# Altium PCB BF-5-0-0.PcbDoc
Units mil, origin at the board's own origin, x right, y up, seen from the top; angles counter-clockwise.
Board outline 3937.01 x 3937.01 mil, 2 copper layers (Top Layer, Bottom Layer); 119 components, 64 nets, 312 pads, 51 vias.
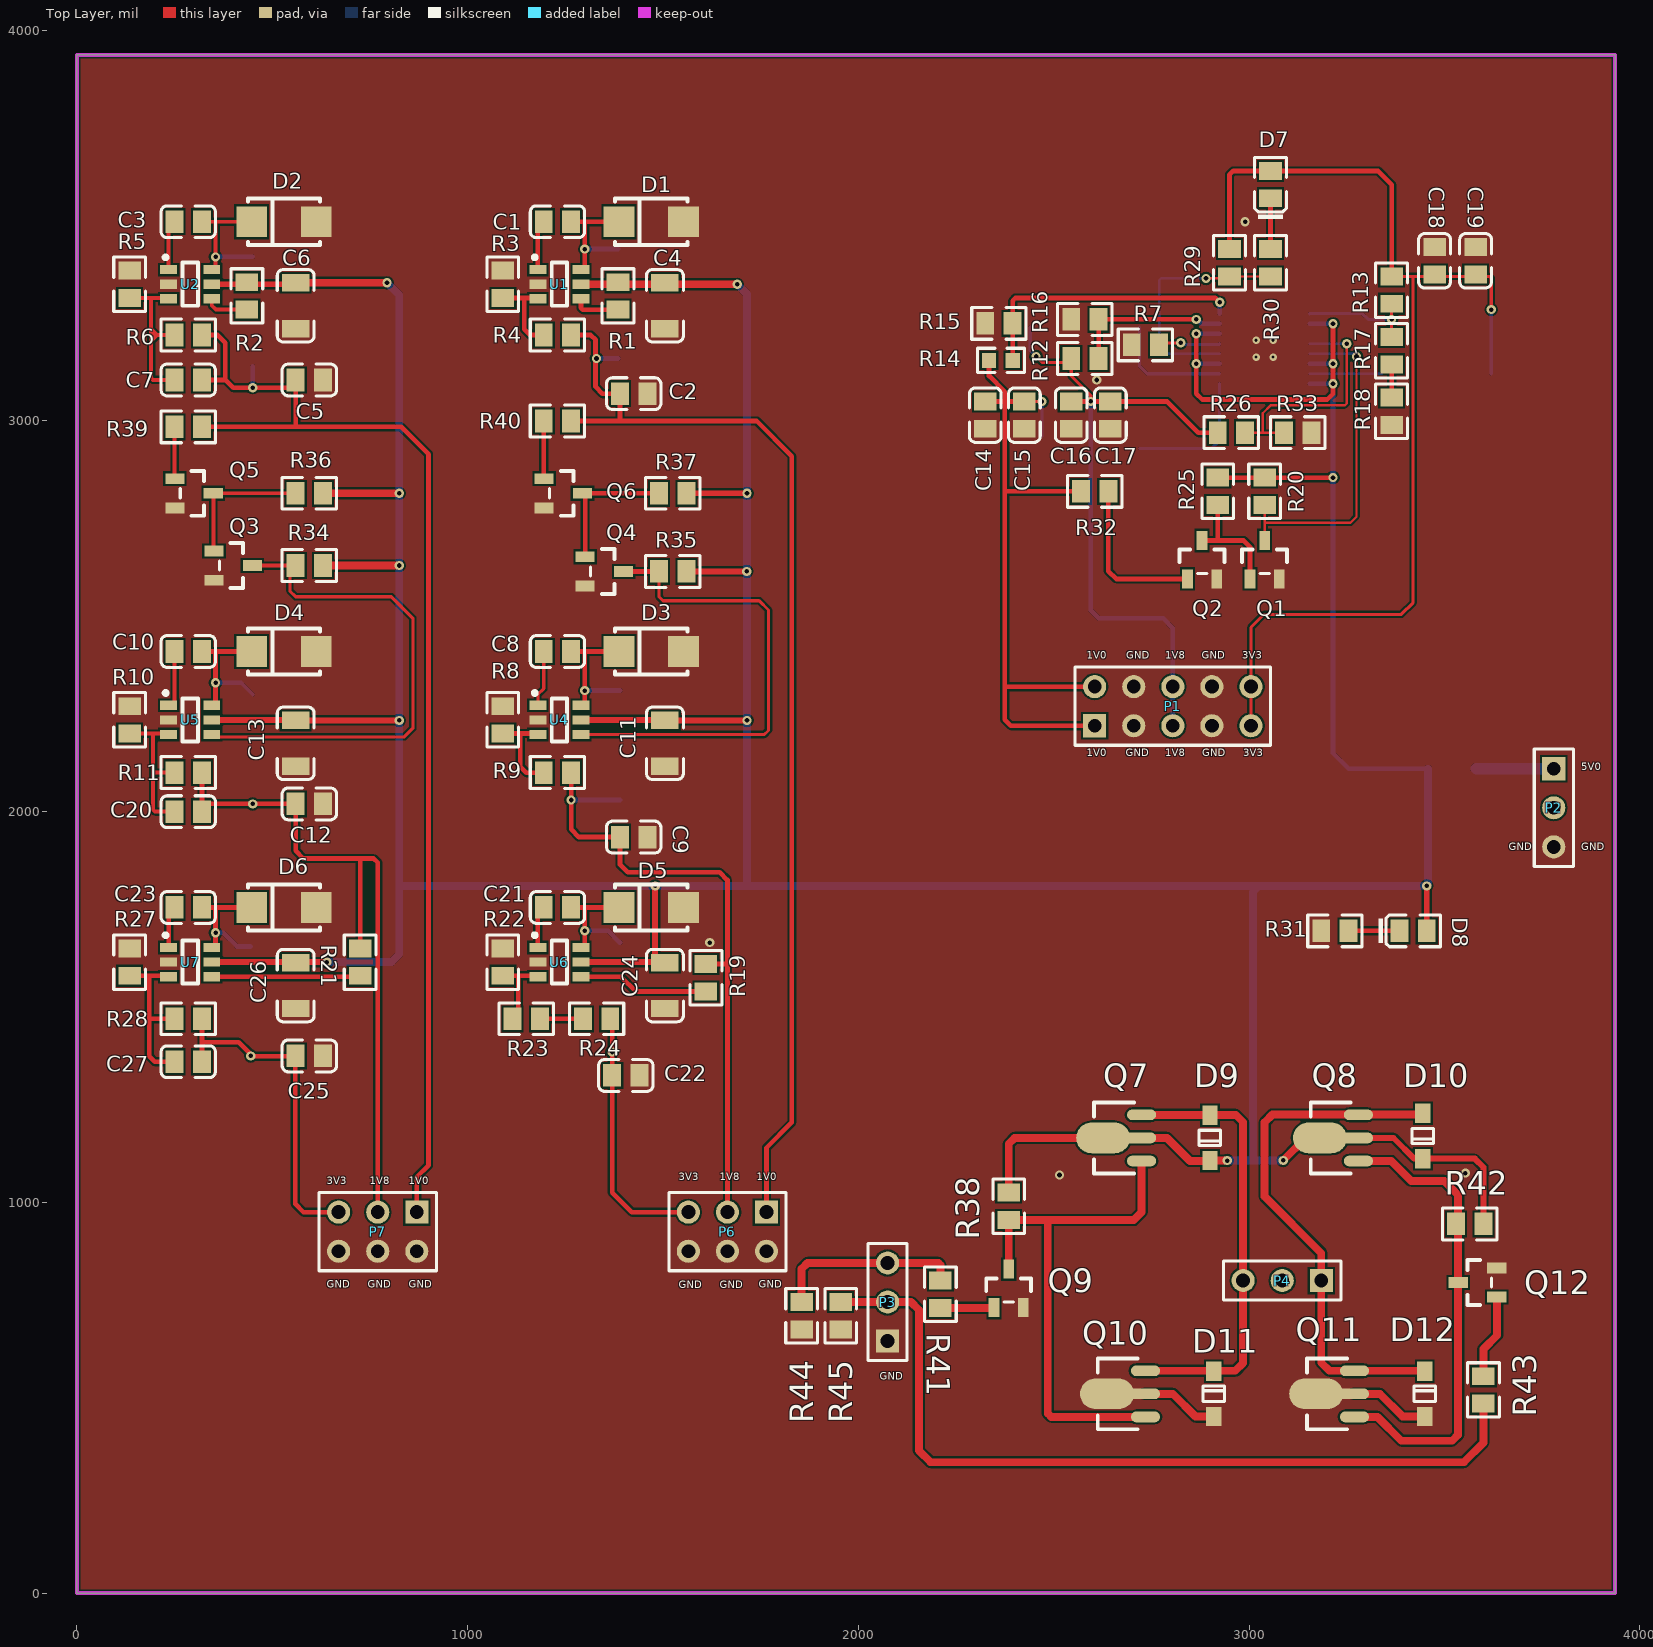
[diagram p0: Top Layer view]
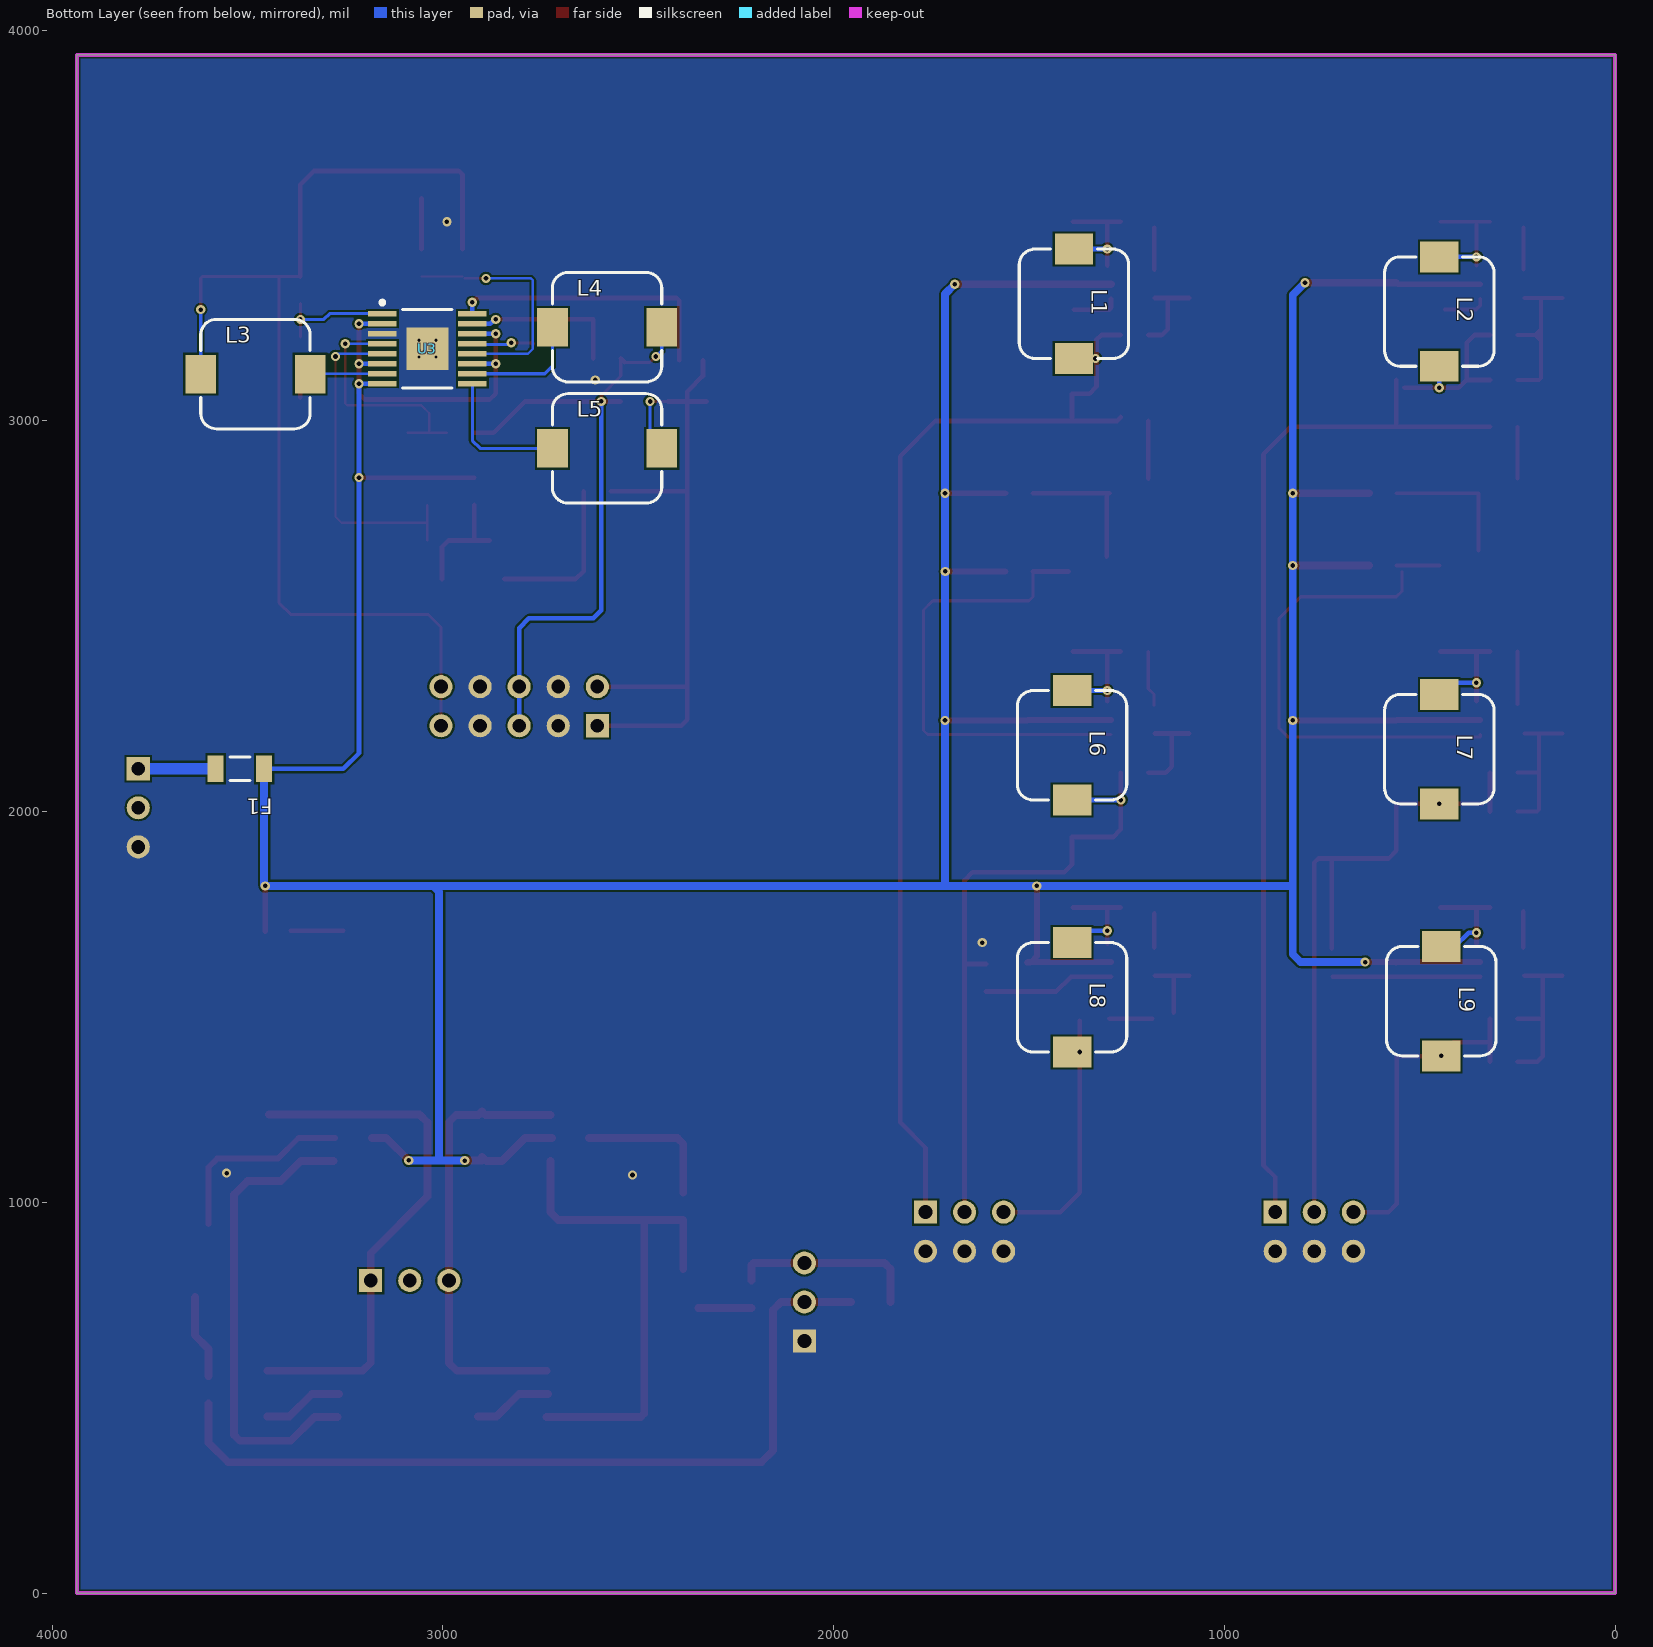
[diagram p1: Bottom Layer view, seen from below]

## Layer stack, top to bottom
Top Solder: solder mask 0.4, Solder Resist, Dk 3.5
Top Layer: signal copper 1.4
Dielectric 1: dielectric 12.6, FR-4, Dk 4.8
Bottom Layer: signal copper 1.4
Bottom Solder: solder mask 0.4, Solder Resist, Dk 3.5

## Board outline
0,0 3937.01,0 3937.01,3937.01 0,3937.01

## Design rules (kind name [scope] priority, off if disabled: settings)
Clearance [All] p1: gap=5 ignorepadtopadclearanceinfootprint=FALSE except(0: Arc-Hole Track-Hole SMDPad-Hole THPad-Hole Via-Hole Fill-Hole Poly-Hole Region-Hole Text-Hole; 10: Arc-Text Track-Text SMDPad-Text THPad-Text Via-Text Fill-Text Poly-Text Region-Text Text-Text)
PlaneClearance [All] p1: clearance=8
PlaneConnect [All] p1: planeconnectstyle=Direct reliefexpansion=20 reliefentries=4 reliefconductorwidth=10 reliefairgap=10
PolygonConnect [All] p1: connectstyle=Direct reliefconductorwidth=10 reliefentries=4 polygonreliefangle="90 Angle" airgapwidth=10
RoutingVias [All] p1: holewidth=28 width=50 viastyle="Through Hole" minholewidth=28 minwidth=50 maxholewidth=28 maxwidth=50
SolderMaskExpansion [All] p1: expansion=4
Width [All] p1: maxlimit=50 minlimit=6 preferedwidth=10 minimp=50.000000 maximp=50.000000 favimp=50.000000
28 further rules are at their usual default settings.

## Components (designator, comment, footprint, x,y, rotation, side; value= is the part's Value field where it differs from the comment)
C1 "10nF (103) 10% 50V" 0805_C 1230,3510 r180 top
C2 "22uF (226) 20% 25V" 0805_C 1425,3070 r0 top
C3 "100nF(104) 10% 50V" 0805_C 285,3510 r180 top
C4 "10uF (106) 10% 50V" 1206_C 1505,3295 r90 top
C5 "10uF (106) 10% 25V" 0805_C 595,3105 r0 top
C6 "10uF (106) 10% 50V" 1206_C 560,3295 r90 top
C7 "33pF (330) 5% 50V" 0805_C 285,3105 r0 top
C8 "10nF (103) 10% 50V" 0805_C 1230,2410 r180 top
C9 "22uF (226) 20% 25V" 0805_C 1425,1935 r0 top
C10 "100nF(104) 10% 50V" 0805_C 285,2410 r180 top
C11 "10uF (106) 10% 50V" 1206_C 1505,2175 r90 top
C12 "10uF (106) 10% 25V" 0805_C 595,2020 r0 top
C13 "10uF (106) 10% 50V" 1206_C 560,2175 r90 top
C14 "20pF (200) 5% 50V" 0805_C 2325,3015 r90 top
C15 "22uF (226) 20% 25V" 0805_C 2425,3015 r90 top
C16 "20pF (200) 5% 50V" 0805_C 2545,3015 r90 top
C17 "10uF (106) 10% 25V" 0805_C 2645,3015 r90 top
C18 "20pF (200) 5% 50V" 0805_C 3475,3410 r270 top
C19 "10uF (106) 10% 25V" 0805_C 3580,3410 r270 top
C20 "33pF (330) 5% 50V" 0805_C 285,2000 r0 top
C21 "10nF (103) 10% 50V" 0805_C 1230,1755 r180 top
C22 "22uF (226) 20% 25V" 0805_C 1405,1325 r0 top
C23 "100nF(104) 10% 50V" 0805_C 285,1755 r180 top
C24 "10uF (106) 10% 50V" 1206_C 1505,1554.96 r90 top
C25 "10uF (106) 10% 25V" 0805_C 595,1375 r0 top
C26 "10uF (106) 10% 50V" 1206_C 560,1554.96 r90 top
C27 "33pF (330) 5% 50V" 0805_C 285,1360 r0 top
D1 "SS54" SMA(DO-214AC)_S1 1470,3510 r0 top
D2 "SS54" SMA(DO-214AC)_S1 530,3510 r0 top
D3 "SS54" SMA(DO-214AC)_S1 1470,2410 r0 top
D4 "SS54" SMA(DO-214AC)_S1 530,2410 r0 top
D5 "SS54" SMA(DO-214AC)_S1 1470,1755 r0 top
D6 "SS54" SMA(DO-214AC)_S1 530,1755 r0 top
D7 "黄灯 0805" 0805_LED_S1 3055,3605 r90 top
D8 "翠绿 0805" 0805_LED_S1 3420,1695 r0 top
D9 "B5819W  SL" SOD-123 2900,1165 r90 top
D10 "B5819W  SL" SOD-123 3445,1170 r90 top
D11 "B5819W  SL" SOD-123 2910,510 r270 top
D12 "B5819W  SL" SOD-123 3450,510 r270 top
F1 "Fuse 1" 1206 3520,2110 r0 bottom
L1 "33uH" L-SMD-7 1385,3300 r270 bottom
L2 "33uH" L-SMD-7 450,3280 r270 bottom
L3 "33uH" L-SMD-7 3480,3120 r180 bottom
L4 "33uH" L-SMD-7 2580,3240 r180 bottom
L5 "33uH" L-SMD-7 2580,2930 r180 bottom
L6 "33uH" L-SMD-7 1390,2170 r270 bottom
L7 "33uH" L-SMD-7 450,2160 r270 bottom
L8 "33uH" L-SMD-7 1390,1525 r270 bottom
L9 "33uH" L-SMD-7 445,1515 r270 bottom
P1 "Header 5X2" HDR2X5 2605,2220 r0 top
P2 "Header 3" HDR1X3 3780,2110 r270 top
P3 "Header 3" HDR1X3 2075,645 r90 top
P4 "Header 3" HDR1X3 3185,800 r180 top
P6 "Header 3X2" HDR2X3 1765,975 r180 top
P7 "Header 3X2" HDR2X3 870,975 r180 top
Q1 "SS8050 Y1" SOT-23(SOT-23-3) 3040,2645 r270 top
Q2 "SS8050 Y1" SOT-23(SOT-23-3) 2880,2645 r270 top
Q3 "MMBT5551  G1" SOT-23(SOT-23-3) 400,2630 r180 top
Q4 "SS8050 Y1" SOT-23(SOT-23-3) 1350,2615 r180 top
Q5 "MMBT5551  G1" SOT-23(SOT-23-3) 300,2815 r180 top
Q6 "SS8050 Y1" SOT-23(SOT-23-3) 1245,2815 r180 top
Q7 "D882" SOT-89(SOT-89-3) 2725,1165 r0 top
Q8 "D882" SOT-89(SOT-89-3) 3280,1165 r0 top
Q9 "SS8050 Y1" SOT-23(SOT-23-3) 2385,780 r270 top
Q10 "B772 160-320" SOT-89(SOT-89-3) 2735,510 r0 top
Q11 "B772 160-320" SOT-89(SOT-89-3) 3270,510 r0 top
Q12 "SS8050 Y1" SOT-23(SOT-23-3) 3585,795 r0 top
R1 "300Ω (3000) ±1%" 0805_R 1385,3320 r90 top
R2 "300Ω (3000) ±1%" 0805_R 435,3320 r90 top
R3 "220KΩ (2203) ±1%" 0805_R 1090,3350 r90 top
R4 "51KΩ (5102) ±1%" 0805_R 1230,3220 r0 top
R5 "470KΩ (4703) ±1%" 0805_R 135,3350 r270 top
R6 "120KΩ (1203) ±1%" 0805_R 285,3220 r0 top
R7 "100KΩ (1003) ±1%" 0805_R 2735,3195 r180 top
R8 "68KΩ (6802) ±1%" 0805_R 1090,2235 r270 top
R9 "82KΩ (8202) ±1%" 0805_R 1230,2100 r0 top
R10 "100KΩ (1003) ±1%" 0805_R 135,2235 r270 top
R11 "120KΩ (1203) ±1%" 0805_R 285,2100 r0 top
R12 "150KΩ (1503) ±1%" 0805_R 2580,3160 r180 top
R13 "180KΩ (1803) ±1%" 0805_R 3365,3335 r90 top
R14 "30KΩ (3002) ±1%" 0603_R 2365,3155 r180 top
R15 "120KΩ (1203) ±1%" 0805_R 2360,3250 r0 top
R16 "120KΩ (1203) ±1%" 0805_R 2580,3260 r0 top
R17 "56KΩ (5602) ±1%" 0805_R 3365,3180 r90 top
R18 "2KΩ (2001) ±1%" 0805_R 3365,3025 r90 top
R19 "300Ω (3000) ±1%" 0805_R 1610,1575 r270 top
R20 "100KΩ (1003) ±1%" 0805_R 3040,2820 r90 top
R21 "300Ω (3000) ±1%" 0805_R 725,1615 r270 top
R22 "16KΩ (1602) ±1%" 0805_R 1090,1615 r270 top
R23 "47KΩ (4702) ±1%" 0805_R 1150,1470 r0 top
R24 "2KΩ (2001) ±1%" 0805_R 1330,1470 r0 top
R25 "100KΩ (1003) ±1%" 0805_R 2920,2820 r90 top
R26 "2KΩ (2001) ±1%" 0805_R 2955,2970 r180 top
R27 "39KΩ (3902) ±1%" 0805_R 135,1615 r270 top
R28 "120KΩ (1203) ±1%" 0805_R 285,1470 r0 top
R29 "100KΩ (1003) ±1%" 0805_R 2950,3405 r90 top
R30 "5.1KΩ (5101) ±1%" 0805_R 3055,3405 r90 top
R31 "5.1KΩ (5101) ±1%" 0805_R 3220,1695 r0 top
R32 "300Ω (3000) ±1%" 0805_R 2605,2820 r180 top
R33 "10KΩ (1002) ±1%" 0805_R 3125,2970 r180 top
R34 "100KΩ (1003) ±1%" 0805_R 595,2630 r0 top
R35 "100KΩ (1003) ±1%" 0805_R 1525,2615 r0 top
R36 "100KΩ (1003) ±1%" 0805_R 595,2815 r0 top
R37 "100KΩ (1003) ±1%" 0805_R 1525,2815 r0 top
R38 "2KΩ (2001) ±1%" 0805_R 2385,990 r90 top
R39 "300Ω (3000) ±1%" 0805_R 285,2985 r180 top
R40 "300Ω (3000) ±1%" 0805_R 1230,3000 r0 top
R41 "1KΩ (1001) ±1%" 0805_R 2210,765 r270 top
R42 "2KΩ (2001) ±1%" 0805_R 3565,945 r0 top
R43 "1KΩ (1001) ±1%" 0805_R 3600,520 r90 top
R44 "10KΩ (1002) ±1%" 0805_R 1855,710 r270 top
R45 "10KΩ (1002) ±1%" 0805_R 1955,710 r90 top
U1 "MP2359DJ-LF-Z" SOT-23-6 1235,3350 r180 top
U2 "MP2451DT-LF-Z" SOT-23-6 290,3350 r180 top
U3 "LTC3569" SOP127P600-16N 3040,3185 r180 bottom
U4 "MP2359DJ-LF-Z" SOT-23-6 1235,2235 r180 top
U5 "MP2451DT-LF-Z" SOT-23-6 290,2235 r180 top
U6 "MP2359DJ-LF-Z" SOT-23-6 1235,1615 r180 top
U7 "MP2451DT-LF-Z" SOT-23-6 290,1615 r180 top

## Footprints (in the part's own frame and the unit in brackets; to place one, negate y for a bottom-side part, rotate by r counter-clockwise, add the part's x,y. Pads: shape width x height; smd on the part's side, far side on the other; paste and mask are expansions set on the pad)
0603_R [mm]
  rect 0.93x0.98 smd: 1(-0.77,0) 2(0.77,0)
  silkscreen extent -1.53,-0.79 1.54,0.79, body extent -0.85,-0.4 0.85,0.4, height 0.56
0805_C [mm]
  rect 1.16x1.47 smd: 1(-0.89,0) 2(0.89,0)
  silkscreen extent -1.77,-1.04 1.77,1.04, body extent -1,-0.62 1,0.63, height 0.77
0805_LED_S1 [mm]
  rect 1.16x1.47 smd: A(0.89,0) K(-0.89,0)
  silkscreen extent -2.24,-1.04 1.77,1.03, body extent -1.01,-0.62 1.01,0.62, height 1.1
0805_R [mm]
  rect 1.16x1.47 smd: 1(-0.89,0) 2(0.89,0)
  silkscreen extent -1.77,-1.04 1.77,1.03, body extent -1,-0.62 1,0.63, height 0.49
1206 [mm]
  rect 1.05x1.75 smd: 1(-1.575,0) 2(1.575,0)
  silkscreen extent -0.65,-0.77 0.65,0.77, body extent -1.6,-0.8 1.6,0.8, height 1.6
1206_C [mm]
  rect 1.13x1.8 smd: 1(-1.49,0) 2(1.49,0)
  silkscreen extent -2.36,-1.2 2.35,1.2, body extent -1.6,-0.81 1.6,0.79, height 1
HDR1X3 [mm] "Connector; Header; 3 Position"
  rect 1.5x1.5 hole 0.9: 1(0,0)
  round 1.5 hole 0.9: 2(2.54,0) 3(5.08,0)
  silkscreen extent -1.27,-1.27 6.35,1.27, body extent -1.27,-1.27 6.35,1.27, height 7.58
HDR2X3 [mm] "Connector; Header; 3x2 Position"
  rect 1.5x1.5 hole 0.9: 1(0,0)
  round 1.5 hole 0.9: 2(0,2.54) 3(2.54,0) 4(2.54,2.54) 5(5.08,0) 6(5.08,2.54)
  silkscreen extent -1.27,-1.27 6.35,3.81, body extent -1.27,-1.27 6.35,3.81, height 7.58
HDR2X5 [mm] "Connector; Header; 5x2 Position"
  rect 1.5x1.5 hole 0.9: 1(0,0)
  round 1.5 hole 0.9: 2(0,2.54) 3(2.54,0) 4(2.54,2.54) 5(5.08,0) 6(5.08,2.54) 7(7.62,0) 8(7.62,2.54) 9(10.16,0) 10(10.16,2.54)
  silkscreen extent -1.27,-1.27 11.43,3.81, body extent -1.27,-1.27 11.43,3.81, height 7.58
L-SMD-7 [mm]
  rect 2x2.5 smd: 1(-3.556,0) 2(3.556,0)
  silkscreen extent -3.56,-3.56 3.56,3.56, body extent -3.56,-3.56 3.56,3.56, height 4
SMA(DO-214AC)_S1 [mm]
  rect 2x2 smd: 1(2.1,0) 2(-2.1,0)
  silkscreen extent -2.35,-1.5 2.35,1.5
SOD-123 [mm]
  rect 1.25x1 smd: 1(1.475,0) 2(-1.475,0)
  silkscreen extent -0.5,-0.7 0.5,0.7, body extent -1.85,-0.77 1.85,0.78, height 1.35
SOP127P600-16N [mm] "LTC3569"
  rect 1.85x0.35 smd: 1(-2.925,2.275) 2(-2.925,1.625) 3(-2.925,0.975) 4(-2.925,0.325) 5(-2.925,-0.325) 6(-2.925,-0.975) 7(-2.925,-1.625) 8(-2.925,-2.275) 9(2.925,-2.275) 10(2.925,-1.625) 11(2.925,-0.975) 12(2.925,-0.325) 13(2.925,0.325) 14(2.925,0.975) 15(2.925,1.625) 16(2.925,2.275)
  rect 2.74x2.74 smd: 17(0,0)
  silkscreen extent -3.05,-2.55 1.6,3.12, body extent -2.25,-2.55 2.25,2.55, height 1.1
SOT-23(SOT-23-3) [mm]
  rect 1.25x0.7 smd: 1(1.25,-0.95) 2(1.25,0.95) 3(-1.25,0)
  silkscreen extent -0.65,-1.46 0.9,1.46, body extent -1.5,-1.5 1.5,1.5, height 1.3
SOT-23-6 [mm]
  rect 1.1x0.6 smd: 1(1.4,-0.95) 2(1.4,0) 3(1.4,0.95) 4(-1.4,0.95) 5(-1.4,0) 6(-1.4,-0.95)
  silkscreen extent -0.5,-1.87 1.72,1.4
SOT-89(SOT-89-3) [mm]
  oval 1.9x0.7 smd: 1(0,-1.5) 3(0,1.5)
  oval 3.5x2 smd: 2(-2.5,0)
  oval 2.1x0.7 smd: 2(-0.1,0)
  silkscreen extent -3.1,-2.3 -0.5,2.3, body extent -3.75,-2.25 0.55,2.25, height 1.51

## Part data
C1 C8 C21: library part "0805 10nF (103) 10% 50V", "贴片电容", Package=0805, SuppliersPartNumber=C1710, ComponentLink1Description=¹©Ó, ComponentLink1URL=http://www.szlcsc.com/product/details_2062.html, Supplier=LC
C2 C9 C15 C22: library part "0805 22uF (226) 20% 25V", "贴片电容", Package=0805, SuppliersPartNumber=C45783, ComponentLink1Description=¹©Ó, ComponentLink1URL=http://www.szlcsc.com/product/details_46786.html, Supplier=LC
C3 C10 C23: library part "0805 100nF(104) 10% 50V", "贴片电容", Package=0805, SuppliersPartNumber=C49678, ComponentLink1Description=¹©Ó, ComponentLink1URL=http://www.szlcsc.com/product/details_50686.html, Supplier=LC
C4 C6 C11 C13 C24 C26: library part "1206 10uF (106) 10% 50V", "贴片电容", Package=1206, SuppliersPartNumber=C13585, ComponentLink1Description=¹©Ó, ComponentLink1URL=http://www.szlcsc.com/product/details_14236.html, Supplier=LC
C5 C12 C17 C19 C25: library part "0805 10uF (106) 10% 25V", "贴片电容", Package=0805, SuppliersPartNumber=C15850, ComponentLink1Description=¹©Ó, ComponentLink1URL=http://www.szlcsc.com/product/details_16532.html, Supplier=LC
C7 C20 C27: library part "0805 33pF (330) 5% 50V", "贴片电容", Package=0805, SuppliersPartNumber=C1814, ComponentLink1Description=¹©Ó, ComponentLink1URL=http://www.szlcsc.com/product/details_2166.html, Supplier=LC
C14 C16 C18: library part "0805 20pF (200) 5% 50V", "贴片电容", Package=0805, SuppliersPartNumber=C1798, ComponentLink1Description=¹©Ó, ComponentLink1URL=http://www.szlcsc.com/product/details_2150.html, Supplier=LC
D1 D2 D3 D4 D5 D6: library part "SMA(DO-214AC) SS54", "二极管", Package=SMA(DO-214AC), SuppliersPartNumber=C22452, ComponentLink1Description=¹©Ó, ComponentLink1URL=http://www.szlcsc.com/product/details_23178.html, Supplier=LC
D7: library part "0805 黄灯", "发光二极管", Package=0805, SuppliersPartNumber=C2296, ComponentLink1Description=¹©Ó, ComponentLink1URL=http://www.szlcsc.com/product/details_2669.html, Supplier=LC
D8: library part "0805 翠绿", "发光二极管", Package=0805, SuppliersPartNumber=C2297, ComponentLink1Description=¹©Ó, ComponentLink1URL=http://www.szlcsc.com/product/details_2670.html, Supplier=LC
D9 D10 D11 D12: library part "SOD-123 B5819W  SL", "肖特基二极管", Package=SOD-123, SuppliersPartNumber=C8598, ComponentLink1Description=¹©Ó, ComponentLink1URL=http://www.szlcsc.com/product/details_9093.html, Supplier=LC
F1: "Fuse", LatestRevisionDate=17-Jul-2002, LatestRevisionNote="Re-released for DXP Platform.", PackageDescription="Thru-Hole; 2 Leads", PackageReference=PIN-W2/E2.8, Published=8-Jun-2000, Publisher="Altium Limited"
L1 L2 L3 L4 L5 L6 L7 L8 L9: library part Inductor_1, "Inductor"
P1: "Header, 5-Pin, Dual row", LatestRevisionDate=17-Jul-2002, LatestRevisionNote="Re-released for DXP Platform.", Publisher="Altium Limited"
P2 P3 P4: "Header, 3-Pin", LatestRevisionDate=17-Jul-2002, LatestRevisionNote="Re-released for DXP Platform.", Publisher="Altium Limited"
P6 P7: "Header, 3-Pin, Dual row", LatestRevisionDate=17-Jul-2002, LatestRevisionNote="Re-released for DXP Platform.", Publisher="Altium Limited"
Q1 Q2 Q4 Q6 Q9 Q12: library part "SOT-23 SS8050 Y1", "三极管", Package=SOT-23, SuppliersPartNumber=C2150, ComponentLink1Description=¹©Ó, ComponentLink1URL=http://www.szlcsc.com/product/details_2507.html, Supplier=LC
Q3 Q5: library part "SOT-23 MMBT5551  G1", "三极管", Package=SOT-23, SuppliersPartNumber=C2145, ComponentLink1Description=¹©Ó, ComponentLink1URL=http://www.szlcsc.com/product/details_2502.html, Supplier=LC
Q7 Q8: library part "SOT-89 D882", "三极管", Package=SOT-89, SuppliersPartNumber=C9634, ComponentLink1Description=¹©Ó, ComponentLink1URL=http://www.szlcsc.com/product/details_10164.html, Supplier=LC
Q10 Q11: library part "SOT-89 B772 160-320", "三极管", Package=SOT-89, SuppliersPartNumber=C24278, ComponentLink1Description=¹©Ó, ComponentLink1URL=http://www.szlcsc.com/product/details_25018.html, Supplier=LC
R1 R2 R19 R21 R32 R39 R40: library part "0805 300Ω (3000) 1%", "贴片电阻", Package=0805, SuppliersPartNumber=C17617, ComponentLink1Description=¹©Ó, ComponentLink1URL=http://www.szlcsc.com/product/details_18305.html, Supplier=LC
R3: library part "0805 220KΩ (2203) 1%", "贴片电阻", Package=0805, SuppliersPartNumber=C17556, ComponentLink1Description=¹©Ó, ComponentLink1URL=http://www.szlcsc.com/product/details_18244.html, Supplier=LC
R4: library part "0805 51KΩ (5102) 1%", "贴片电阻", Package=0805, SuppliersPartNumber=C17737, ComponentLink1Description=¹©Ó, ComponentLink1URL=http://www.szlcsc.com/product/details_18425.html, Supplier=LC
R5: library part "0805 470KΩ (4703) 1%", "贴片电阻", Package=0805, SuppliersPartNumber=C17709, ComponentLink1Description=¹©Ó, ComponentLink1URL=http://www.szlcsc.com/product/details_18397.html, Supplier=LC
R6 R11 R15 R16 R28: library part "0805 120KΩ (1203) 1%", "贴片电阻", Package=0805, SuppliersPartNumber=C17436, ComponentLink1Description=¹©Ó, ComponentLink1URL=http://www.szlcsc.com/product/details_18124.html, Supplier=LC
R7 R10 R20 R25 R29 R34 R35 R36 R37: library part "0805 100KΩ (1003) 1%", "贴片电阻", Package=0805, SuppliersPartNumber=C17407, ComponentLink1Description=¹©Ó, ComponentLink1URL=http://www.szlcsc.com/product/details_18095.html, Supplier=LC
R8: library part "0805 68KΩ (6802) 1%", "贴片电阻", Package=0805, SuppliersPartNumber=C17801, ComponentLink1Description=¹©Ó, ComponentLink1URL=http://www.szlcsc.com/product/details_18489.html, Supplier=LC
R9: library part "0805 82KΩ (8202) 1%", "贴片电阻", Package=0805, SuppliersPartNumber=C17840, ComponentLink1Description=¹©Ó, ComponentLink1URL=http://www.szlcsc.com/product/details_18528.html, Supplier=LC
R12: library part "0805 150KΩ (1503) 1%", "贴片电阻", Package=0805, SuppliersPartNumber=C17470, ComponentLink1Description=¹©Ó, ComponentLink1URL=http://www.szlcsc.com/product/details_18158.html, Supplier=LC
R13: library part "0805 180KΩ (1803) 1%", "贴片电阻", Package=0805, SuppliersPartNumber=C17501, ComponentLink1Description=¹©Ó, ComponentLink1URL=http://www.szlcsc.com/product/details_18189.html, Supplier=LC
R14: library part "0603 30KΩ (3002) 1%", "贴片电阻", Package=0603, SuppliersPartNumber=C22984, ComponentLink1Description=¹©Ó, ComponentLink1URL=http://www.szlcsc.com/product/details_23711.html, Supplier=LC
R17: library part "0805 56KΩ (5602) 1%", "贴片电阻", Package=0805, SuppliersPartNumber=C17756, ComponentLink1Description=¹©Ó, ComponentLink1URL=http://www.szlcsc.com/product/details_18444.html, Supplier=LC
R18 R24 R26 R38 R42: library part "0805 2KΩ (2001) 1%", "贴片电阻", Package=0805, SuppliersPartNumber=C17604, ComponentLink1Description=¹©Ó, ComponentLink1URL=http://www.szlcsc.com/product/details_18292.html, Supplier=LC
R22: library part "0805 16KΩ (1602) 1%", "贴片电阻", Package=0805, SuppliersPartNumber=C17490, ComponentLink1Description=¹©Ó, ComponentLink1URL=http://www.szlcsc.com/product/details_18178.html, Supplier=LC
R23: library part "0805 47KΩ (4702) 1%", "贴片电阻", Package=0805, SuppliersPartNumber=C17713, ComponentLink1Description=¹©Ó, ComponentLink1URL=http://www.szlcsc.com/product/details_18401.html, Supplier=LC
R27: library part "0805 39KΩ (3902) 1%", "贴片电阻", Package=0805, SuppliersPartNumber=C25826, ComponentLink1Description=¹©Ó, ComponentLink1URL=http://www.szlcsc.com/product/details_26569.html, Supplier=LC
R30 R31: library part "0805 5.1KΩ (5101) 1%", "贴片电阻", Package=0805, SuppliersPartNumber=C27834, ComponentLink1Description=¹©Ó, ComponentLink1URL=http://www.szlcsc.com/product/details_28584.html, Supplier=LC
R33 R44 R45: library part "0805 10KΩ (1002) 1%", "贴片电阻", Package=0805, SuppliersPartNumber=C17414, ComponentLink1URL=http://www.szlcsc.com/product/details_18102.html, Supplier=LC
  R33: ComponentLink1Description=¹©Ó
  R44 R45: ComponentLink1Description=供应
R41 R43: library part "0805 1KΩ (1001) 1%", "贴片电阻", Package=0805, SuppliersPartNumber=C17513, ComponentLink1Description=¹©Ó, ComponentLink1URL=http://www.szlcsc.com/product/details_18201.html, Supplier=LC
U1 U4 U6: library part MP2359DJ-LF-Z_[C14259], "DC-DCоƬ", Package=SOT-23-6, SuppliersPartNumber=C14259, ComponentLink1Description=¹©Ó, ComponentLink1URL=http://www.szlcsc.com/product/details_14917.html, Supplier=LC
U2 U5 U7: library part MP2451DT-LF-Z_[C14123], "DC-DCоƬ", Package=SOT-23-6, SuppliersPartNumber=C14123, ComponentLink1Description=¹©Ó, ComponentLink1URL=http://www.szlcsc.com/product/details_14780.html, Supplier=LC

## Via types
v1: diameter 23.62, hole 11.81, Top Layer to Bottom Layer, tented both sides, 47 vias
v2: diameter 19.68, hole 7.87, Top Layer to Bottom Layer, 4 vias

## Nets (pads, with @x,y where several pads share a name; then routed paths per layer and width w, separated by ;. In a path a pad name is that pad's centre, name@x,y a point inside that pad or via, vN(x,y) a via of type N, cw(c..) or ccw(c..) an arc to the next point about the centre after c; other vN are vias at no path point)
1V0: C14.2 C15.2 L5.2 P1.1 P1.2 R14.2 R32.2 | length 1827.9
  Top Layer w8: C15.2 v1(2470,3050)
  Top Layer w12: C14.2 2375,3050.04 ; R14.2 2334.68,3115.32 2375,3075 2375,3050.04 ; 2380,2320 P1.2 ; C15.2 2375,3050.04 ; R32.2 2375,2820 ; P1.1 2390,2220 2375,2235 2375,2820 ; 2375,2820 2375,3050.04
  Bottom Layer w8: L5.2@2470,2960 v1(2470,3050)
1V8: C16.2 C17.2 L4.2 P1.5 P1.6 R12.2 R26.2 | length 1734
  Top Layer w8: v1(2455,3165) 2470,3150 R12.2@2534.96,3150 ; R12.2 2544.96,3115.04 2595,3065 v1(2595,3050.04)
  Top Layer w12: R12.2@2534.96,3150 R12.2 ; C16.2 v1(2595,3050.04) C17.2 2789.92,3050.04 2869.96,2970 R26.2
  Bottom Layer w8: L4.2 2440,3180 v1(2455,3165)
  Bottom Layer w12: v1(2595,3050.04) 2595,2515 2615,2495 2780,2495 2805,2470 P1.6 P1.5
3V3: C18.2 C19.2 D7.A L3.1 P1.9 P1.10 R13.2 R29.2 | length 2888.6
  Top Layer w8: P1.9 P1.10 3005,2471.65 3038.35,2505 3390,2505 3420,2535 3420,3370.04 ; R13.2 3420,3370.04 ; v1(3620,3285) 3620,3365 3614.96,3370.04 3420,3370.04
  Top Layer w12: R29.2 2950,3630 2960.04,3640.04 D7.A 3329.96,3640.04 3365,3605 R13.2
  Bottom Layer w8: L3.1 v1(3620,3285)
5V0: C4.2 C6.2 C11.2 C13.2 C24.2 C26.2 D8.A D9.2 D10.2 F1.1 Q7.2 Q8.2 R1.2 R2.2 R20.2 R25.2 R34.2 R35.2 R36.2 R37.2 R38.2 R42.2 U1.5 U2.5 U3.2 U3.6 U3.8 U3.11 U3.14 U4.5 U5.5 U6.5 U7.5 | length 14275.6
  Top Layer w12: v1(2865,3223.39) v1(2865,3146.61) 2865,3070 2880,3055 3200,3055 3215,3070 v1(3215,3095.43) v1(3215,3146.61) v1(3215,3248.98) ; R25.2 R20.2 v1(3215,2855.04)
  Top Layer w15: U7.5 C26.2@558.62,1615 ; U5.5 C13.2@558.66,2235 ; U2.5 C6.2@556.34,3350 ; C26.2 561.38,1615 v1(640,1615) ; C13.2 v1(825,2233.66) ; U6.5 C24.2@1495,1615 ; U4.5 C11.2@1503.66,2235 ; v1(1480,1810) 1480,1630 C24.2@1495,1615 ; C24.2@1503.62,1615 C24.2@1495,1615 ; C24.2 1496.38,1613.62 C24.2@1495,1615 ; C11.2 v1(1715,2233.66) ; R35.2 v1(1714.25,2615) ; R37.2 v1(1715,2815) ; Q8.2@3276.06,1165 3369.96,1165 3423.03,1111.93 D10.2 3578.07,1111.93 3600.04,1089.96 R42.2 ; D8.A v1(3455,1810)
  Top Layer w20: C6.2 v1(793.62,3353.66) ; R34.2 v1(825,2630) ; R36.2 v1(825,2815) ; U1.5 v1(1690,3350) ; R38.2 2385,1150 2400,1165 Q7.2@2626.57,1165 ; Q7.2@2721.06,1165 2790,1165 2849.06,1105.94 2889.02,1105.94 D9.2@2900,1116.93 ; D9.2 v1(2944.02,1106.93) ; v1(3087.5,1107.5) 3145,1165 Q8.2@3181.57,1165
  Bottom Layer w12: v1(2865,3146.61) U3.11 ; v1(2865,3223.39) U3.14 ; U3.8 v1(3215,3095.43) v1(3215,2855.04) 3215,2150 3255,2110 F1.1 ; U3.6 v1(3215,3146.61) ; U3.2 v1(3215,3248.98)
  Bottom Layer w20: v1(640,1615) 805,1615 825,1635 825,1810 ; v1(793.62,3353.66) 825,3322.28 v1(825,2233.66) 825,1810 ; v1(1690,3350) 1715,3325 v1(1715,2233.66) 1715,1810 ; v1(2944.02,1106.93) 3010,1106.93 ; v1@3086.93,1106.93 3010,1106.93 ; v1(3455,1810) 3025,1810 ; v1(3455,1810) 3457.99,1812.95 F1.1 ; 825,1810 v1(1480,1810) 1715,1810 ; 1715,1810 3025,1810 ; 3010,1106.93 3010,1795 3025,1810
EN1V80: Q3.3 R34.1 U5.4 | length 1316.5
  Top Layer w8: U5.4 345.12,2191.42 837.95,2191.42 860,2213.46 860,2495 805,2550 560,2550 545,2565 R34.1@545,2615.04
  Top Layer w10: Q3.3 R34.1
EN1V81: Q4.3 R35.1 U4.4 | length 1242.2
  Top Layer w8: U4.4 1759.66,2197.6 1770,2207.94 1770,2516.24 1746.24,2540 1500,2540 1489.96,2550.04 R35.1
  Top Layer w12: Q4.3 R35.1
EN2: Q1.3 R20.1 U3.5 | length 866.3
  Top Layer w6: Q1.3 3040,2739.59 ; R20.1 3040,2739.59 ; v1(3275,3165) 3275,2755 3259.59,2739.59 3040,2739.59
  Bottom Layer w6: U3.5 3270,3172.2 3275,3167.2 v1(3275,3165)
EN3: R26.1 R33.2 U3.4 | length 617
  Top Layer w6: R26.1 3035,2970 ; R33.2 3035,2970 ; v1@3243.17,3196.83 3250,3190 3250,3045 3245,3040 3055,3040 3035,3020 3035,2970
  Bottom Layer w6: U3.4 v1@3242.2,3197.8
  other v1: 3250,3197.8
FB1: R14.1 R15.2 U3.16 | length 719.2
  Top Layer w12: R14.1@2395.04,3155.28 R15.2 2395.04,3307.64 2402.36,3314.96 2913.86,3314.96 v1(2924.84,3303.98)
  Bottom Layer w12: U3.16 v1(2924.84,3303.98)
FB2: R12.1 R16.2 U3.15 | length 414.4
  Top Layer w12: R12.1 R16.2 v1(2865,3260)
  Bottom Layer w12: v1(2865,3260) 2867.72,3260 2878.74,3248.98 U3.15
FB3: R13.1 R17.2 U3.1 | length 301
  Top Layer w8: R17.2 R13.1
  Bottom Layer w8: U3.1 3155.38,3274.79 3290.21,3274.79 3305,3260 v1(3365,3260)
GND: C2.2 C4.1 C5.2 C6.1 C9.2 C11.1 C12.2 C13.1 C14.1 C15.1 C16.1 C17.1 C18.1 C19.1 C22.2 C24.1 C25.2 C26.1 D1.1 D2.1 D3.1 D4.1 D5.1 D6.1 D11.1 D12.1 P1.3 P1.4 P1.7 P1.8 P2.3 P3.1 P6.2 P6.4 P6.6 P7.2 P7.4 P7.6 Q1.2 Q2.2 Q3.2 Q4.2 Q5.2 Q6.2 Q9.2 Q10.2 Q11.2 Q12.2 R3.2 R5.1 R7.2 R8.1 R10.1 R15.1 R16.1 R18.1 R22.1 R27.1 R31.1 R33.1 R44.2 R45.1 U1.2 U2.2 U3.3 U3.17 U4.2 U5.2 U6.2 U7.2 | length 411
  Top Layer w20: Q10.2@2731.06,510 2805,510 2863.07,451.93 D11.1 ; Q11.2@3266.06,510 3335,510 3393.07,451.93 D12.1
  other v1: 2515,1070 3553.84,1075 1620,1665 2610,3105 2990.04,3510
  other v2: 3018.35,3163.35 3061.65,3163.35 3018.35,3206.65 3061.65,3206.65
NetC1_1: C1.1 D1.2 L1.1 U1.6 | length 320
  Top Layer w12: C1.1 1300,3510 ; U1.6@1300,3397.28 1300,3510 ; D1.2 1300,3510
  Bottom Layer w12: v1(1300,3440) L1.1
NetC1_2: C1.2 U1.1 | length 107.5
  Top Layer w12: U1.1 C1.2@1179.88,3494.92
NetC3_1: C3.1 D2.2 L2.1 U2.6 | length 335
  Top Layer w10: C3.1 355,3510 ; U2.6@355,3397.28 355,3510 ; D2.2 355,3510
  Bottom Layer w12: v1(355,3420) L2.1
NetC3_2: C3.2 U2.1 | length 107.5
  Top Layer w10: U2.1 C3.2@234.88,3494.92
NetC7_1: C7.1 R5.2 R6.1 U2.3 | length 466.9
  Top Layer w10: R5.2 190,3314.96 ; U2.3@232.52,3314.96 190,3314.96 ; C7.1 195,3105 190,3110 190,3205 ; R6.1 205,3220 ; 190,3205 190,3220 ; 190,3205 205,3220 ; 190,3220 205,3220 ; 190,3220 190,3235 ; 190,3235 190,3314.96 ; 190,3235 205,3220
NetC8_1: C8.1 D3.2 L6.1 U4.6 | length 340
  Top Layer w12: C8.1 1300,2410 ; U4.6@1300,2282.28 1300,2410 ; D3.2 1300,2410
  Bottom Layer w12: v1(1300,2310) L6.1
NetC8_2: C8.2 U4.1 | length 143.8
  Top Layer w8: U4.1 1179.88,2299.88 1194.96,2314.96 C8.2
NetC10_1: C10.1 D4.2 L7.1 U5.6 | length 362.4
  Top Layer w12: C10.1 355,2410 ; U5.6@355,2282.28 v1(355,2330) 355,2410 ; D4.2 355,2410
  Bottom Layer w10: L7.1@420,2330 L7.1
  Bottom Layer w12: v1(355,2330) L7.1@420,2330
NetC10_2: C10.2 U5.1 | length 135
  Top Layer w10: U5.1@249.96,2275 C10.2
NetC20_1: C20.1 R10.2 R11.1 U5.3 | length 404.5
  Top Layer w10: R10.2 195,2199.96 ; U5.3@232.52,2199.96 195,2199.96 ; C20.1 200,2000 195,2005 195,2100 ; R11.1 195,2100 ; 195,2100 195,2199.96
NetC21_1: C21.1 D5.2 L8.1 U6.6 | length 317.4
  Top Layer w12: C21.1 1300,1755 ; U6.6@1300,1662.28 1300,1755 ; D5.2 1300,1755
  Bottom Layer w12: v1(1300,1695) 1360,1695 L8.1
NetC21_2: C21.2 U6.1 | length 87.5
  Top Layer w12: U6.1 C21.2@1179.88,1739.92
NetC23_1: C23.1 D6.2 L9.1 U7.6 | length 324.5
  Top Layer w12: C23.1 355,1755 ; U7.6@355,1662.28 355,1755 ; D6.2 355,1755
  Bottom Layer w12: v1(355,1690) 375,1690 410,1655 L9.1
NetC23_2: C23.2 U7.1 | length 92.7
  Top Layer w12: U7.1 C23.2@234.88,1745.12
NetC27_1: C27.1 R27.2 R28.1 U7.3 | length 439.2
  Top Layer w12: R27.2 185,1579.96 ; U7.3@232.52,1579.96 185,1579.96 ; C27.1 199.06,1360 185,1374.06 185,1470 ; R28.1 185,1470 ; 185,1470 185,1579.96
NetD7_K: D7.K R30.2 | length 129.9
  Top Layer w12: R30.2 D7.K
NetD8_K: D8.K R31.2 | length 134.9
  Top Layer w12: R31.2 D8.K@3389.96,1695
NetD9_1: D9.1 D11.2 P4.3 Q7.3 Q10.3 | length 1136.8
  Top Layer w20: Q7.3 D9.1@2890.98,1224.06 ; Q10.3 2965,569.06 2985,589.06 P4.3 2985,1205 2965.94,1224.06 2909.02,1224.06 D9.1@2900,1233.07
NetD10_1: D10.1 D12.2 P4.1 Q8.3 Q11.3 | length 1361
  Top Layer w20: D10.1@3445,1225 3060,1225 3040,1205 3040,1015 3185,870 P4.1 3185,590 3205.94,569.06 Q11.3 D12.2@3449.02,569.06
NetL3_2: L3.2 U3.7 | length 183.8
  Bottom Layer w7: U3.7 L3.2@3338.98,3121.02
NetL4_1: L4.1 U3.10 | length 313
  Bottom Layer w8: L4.1 2720,3140 2739.2,3120.8 2924.84,3120.8 U3.10
NetL5_1: L5.1 U3.9 | length 358.7
  Bottom Layer w8: L5.1 2905,2930 2924.84,2949.84 U3.9
NetP3_2: P3.2 R43.1 R45.2 | length 2146.4
  Top Layer w20: R45.2 P3.2 2135,745 2155,725 2155,365 2185,335 3550,335 3600,385 R43.1
NetP3_3: P3.3 R41.1 R44.1 | length 488.2
  Top Layer w20: R44.1 1855,830 1870,845 P3.3 2205,845 2210,840 R41.1
NetQ1_1: Q1.1 Q2.3 R25.1 | length 301.1
  Top Layer w12: Q2.3 2985.79,2694.21 3002.6,2677.4 Q1.1 ; 2920,2695 R25.1
NetQ2_1: Q2.1 R32.1 | length 415.1
  Top Layer w12: R32.1 2640.04,2615.75 2660,2595.79 Q2.1
NetQ3_1: Q3.1 Q5.3 R36.1 | length 356.8
  Top Layer w10: Q3.1@349.21,2668.98 Q5.3 R36.1
NetQ4_1: Q4.1 Q6.3 R37.1 | length 351.8
  Top Layer w12: Q6.3 R37.1 ; Q4.1 Q6.3@1300.79,2808.43
NetQ5_1: Q5.1 R39.2 | length 131.8
  Top Layer w10: Q5.1@249.96,2853.23 R39.2
NetQ6_1: Q6.1 R40.1 | length 147.6
  Top Layer w12: Q6.1@1194.96,2852.4 R40.1
NetQ7_1: Q7.1 Q9.3 Q10.1 R38.1 | length 1353.7
  Top Layer w20: Q9.3 R38.1 2485,954.96 ; Q7.1 2725,975 2704.96,954.96 2485,954.96 ; Q10.1 2494.06,450.94 2485,460 2485,954.96
NetQ8_1: Q8.1 Q11.1 Q12.3 R42.1 | length 1202.1
  Top Layer w20: Q11.1 3329.06,450.94 3390,390 3520,390 3535,405 3535,1020 3500,1055 3415,1055 3364.06,1105.94 Q8.1
NetQ9_1: Q9.1 R41.2 | length 136.8
  Top Layer w20: R41.2 Q9.1@2346.77,729.96
NetQ12_1: Q12.1 R43.2 | length 217.4
  Top Layer w20: R43.2 3600,625 3635,660 3635,756.81 Q12.1
NetR1_1: R1.1 U1.4 | length 119.7
  Top Layer w12: U1.4 1290.12,3289.84 1295,3284.96 R1.1
NetR2_1: R2.1 U2.4 | length 111.2
  Top Layer w10: U2.4 345.12,3295.67 355.83,3284.96 R2.1
NetR3_1: R3.1 R4.1 U1.3 | length 223.7
  Top Layer w12: R3.1 1145,3314.96 ; U1.3@1177.52,3314.96 1145,3314.96 ; R4.1 1160,3220 1145,3235 1145,3314.96
NetR7_1: R7.1 U3.13 | length 147.2
  Top Layer w8: R7.1@2772.24,3200 v1@2820,3200
  Top Layer w12: R7.1@2770.04,3197.8 R7.1@2772.24,3200
  Bottom Layer w8: v1@2829.43,3195.57 2922.62,3195.57 U3.13
  other v1: 2825,3200
NetR8_2: R8.2 R9.1 U4.3 | length 238.7
  Top Layer w12: R8.2 1135,2199.96 ; U4.3@1177.52,2199.96 1135,2199.96 ; R9.1 1150,2100 1135,2115 1135,2199.96
NetR17_1: R17.1 R18.2 | length 84.9
  Top Layer w12: R18.2 R17.1
NetR19_2: R19.2 U6.4 | length 335.5
  Top Layer w12: U6.4 1392.4,1577.6 1430.04,1539.96 R19.2
NetR21_2: R21.2 U7.4 | length 377.5
  Top Layer w12: U7.4 R21.2@722.64,1577.6
NetR22_2: R22.2 R23.1 U6.3 | length 182.4
  Top Layer w12: R22.2 1130,1579.96 ; R23.1@1130,1485.04 1130,1579.96 ; U6.3@1177.52,1579.96 1130,1579.96
NetR23_2: R23.2 R24.1 | length 109.9
  Top Layer w12: R23.2 R24.1
PGOOD: R29.1 R30.1 U3.12 | length 617.3
  Top Layer w6: v1(2890,3365) R29.1@2945.04,3365 ; R29.1 R30.1
  Bottom Layer w6: v1(2890,3365) 2775,3365 2770,3360 2770,3185 2782.8,3172.2 U3.12
VBUS: F1.2 P2.1 | length 198
  Bottom Layer w30: F1.2 P2.1
VOUT0-1V0: C5.1 C7.2 L2.2 P7.1 R6.2 R39.1 | length 3127.8
  Top Layer w12: R39.1 559.96,2985 ; C7.2 380,3105 ; R6.2 360,3220 380,3200 380,3105 ; C5.1@539.96,3085 v1(450,3085) 400,3085 380,3105 ; C5.1 559.96,2985 ; P7.1 870,1065 900,1095 900,2915 830,2985 559.96,2985
  Bottom Layer w12: v1(450,3085) L2.2
VOUT0-1V8: C12.1 C20.2 L7.2 P7.3 R11.2 R21.1 | length 1787.3
  Top Layer w12: C20.2 R11.2 ; C20.2@340.04,2020 v1(450,2020) C12.1 559.96,1900.04 580,1880 725,1880 ; R21.1 725,1880 ; P7.3 770,1870 760,1880 725,1880
VOUT0-3V3: C25.1 C27.2 L9.2 P7.5 R28.2 | length 861.6
  Top Layer w12: C27.2 320.04,1410 ; R28.2 320.04,1410 ; P7.5 580,975 559.02,995.98 559.02,1374.06 450.16,1374.06 414.21,1410 320.04,1410
  other v1: 445,1375
VOUT1-1V0: C2.1 L1.2 P6.1 R4.2 R40.2 | length 2950.7
  Top Layer w12: R40.2@1265.04,3009.96 1275,3000 1390,3000 ; R4.2 1315,3220 1327.5,3207.5 1327.5,3087.5 1345,3070 C2.1 1389.96,3000.04 1390,3000 ; P6.1 1765,1139.61 1830,1204.61 1830,2910 1740,3000 1390,3000
  Bottom Layer w12: v1(1330,3160) L1.2
VOUT1-1V8: C9.1 L6.2 P6.3 R9.2 R19.1 | length 1669.8
  Top Layer w12: R9.2 1265.04,1954.96 1285,1935 C9.1 1389.96,1865.04 1410,1845 1645,1845 1665,1825 P6.3 ; R19.1 1664.96,1610.04
  Bottom Layer w12: v1(1265,2030) L6.2
VOUT1-3V3: C22.1 L8.2 P6.5 R24.2 | length 655.8
  Top Layer w12: R24.2@1369.96,1465.08 v1(1369.96,1385) C22.1 1369.96,1025.04 1420,975 P6.5
pads on no net: P2.2 P4.2

## Polygon pours and split planes (outlines as drawn)
GND on Top Layer "GND_L01_P000" (solid, remove dead copper, pour order 0): 2.55,3940.42 2.55,3.41 3939.55,3.41 3939.55,3940.42
GND on Bottom Layer "GND_L02_P002" (solid, remove dead copper, pour order 2): 3936.22,3936.22 3936.22,-0.78 -0.78,-0.78 -0.78,3936.22

## Keep-outs
Keep-Out Layer:
  the board outline again, w10

## Silkscreen, mask and mechanical layers (free items; w line width, h text height)
Top Overlay:
  text "1V0" at 2585,2385 h32
  text "GND" at 2685.75,2385 h32
  text "1V8" at 2785,2385 h32
  text "GND" at 2879.25,2385 h32
  text "3V3" at 2982.52,2385 h32
  text "1V0" at 2585,2135 h32
  text "GND" at 2685,2135 h32
  text "1V8" at 2785,2135 h32
  text "GND" at 2880,2135 h32
  text "3V3" at 2985,2135 h32
  text "5V0" at 3850,2100 h32
  text "GND" at 3665,1895 h32
  text "GND" at 3850,1895 h32
  text "3V3" at 1540,1050 h32
  text "1V8" at 1645,1050 h32
  text "1V0" at 1740,1050 h32
  text "3V3" at 640,1040 h32
  text "1V8" at 750,1040 h32
  text "1V0" at 850,1040 h32
  text "GND" at 640,775 h32
  text "GND" at 745,775 h32
  text "GND" at 850,775 h32
  text "GND" at 1745,775 h32
  text "GND" at 1540,773.5 h32
  text "GND" at 1645,773.5 h32
  text "GND" at 2055,540 h32